# Altium PCB PCB1.PcbDoc (part 2 of 4)
Units mm, origin at the board's own origin, x right, y up, seen from the top; angles counter-clockwise.
Board outline 200 x 55 mm, 4 copper layers (Top Layer, Power Layer, GND Layer, Bottom Layer), stack 1.714 mm thick; 402 components, 269 nets, 1338 pads, 752 vias.
Unrouted connection lines stored in the file: 36.
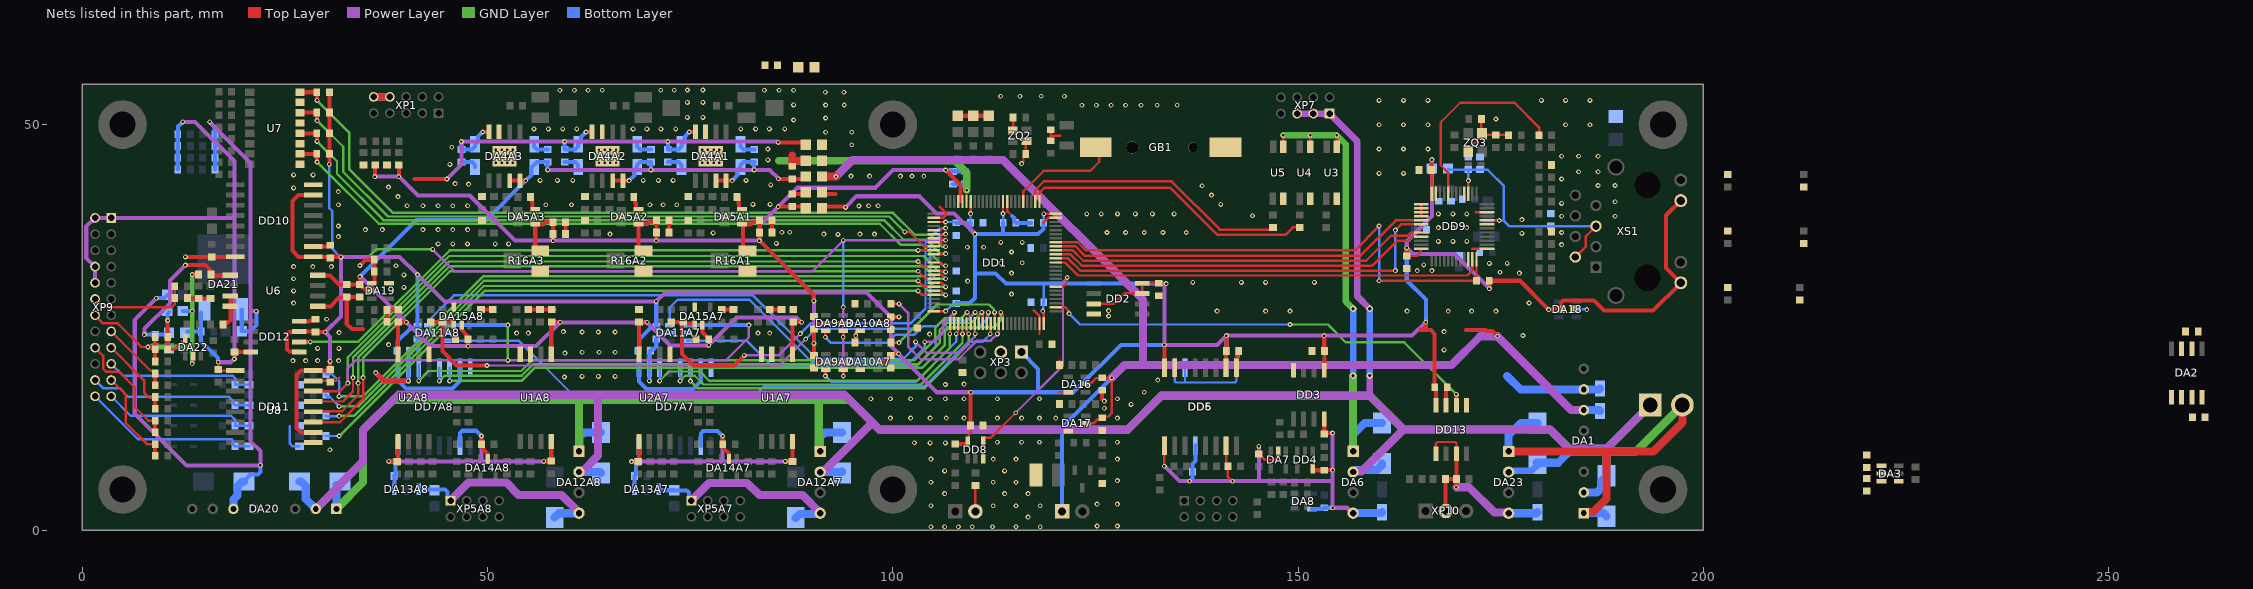
[diagram p4: the nets of this part, all layers, seen from the top]

## Via types
v1: diameter 0.6, hole 0.3, Top Layer to Bottom Layer, tented both sides, 711 vias
v2: diameter 0.6, hole 0.3, Top Layer to Bottom Layer, 36 vias
v3: diameter 0.8, hole 0.4, Top Layer to Bottom Layer, tented both sides, 4 vias
v4: diameter 0.5, hole 0.2, Top Layer to Bottom Layer, tented both sides, 1 vias

## Nets (pads, with @x,y where several pads share a name; then routed paths per layer and width w, separated by ;. In a path a pad name is that pad's centre, name@x,y a point inside that pad or via, vN(x,y) a via of type N, cw(c..) or ccw(c..) an arc to the next point about the centre after c; other vN are vias at no path point) (continued)
+3.3V: C6.1 C10.1 C13.2 C14.2 C15.2 C19.1 C20.1 C26.1 C37.1 C40.1 C41.1 C51A7.1 C51A8.1 C54A7.1 C54A8.1 C60A7.1 C60A8.1 C77.1 C80.1 C85.1 C90.1 C100.1 C103.1 C105.1 C119.1 DA2.2 DA2.3 DA2.6 DA2.7 DA10A7.2 DA10A8.2 DA11A7.5 DA11A8.5 DA18.5 DD1.11 DD1.19 DD1.28 DD1.50 DD1.75 DD1.100 DD2.3 DD2.7 DD2.8 DD3.1 DD5.10 DD5.16 DD6.7 DD7A7.1 DD7A7.7 DD7A8.1 DD7A8.7 DD8.5 DD9.24 DD9.36 DD10.1 DD10.7 DD11.10 DD11.16 DD12.1 DD12.3 DD13.8 L2.1 L6.1 R54.2 R69.2 R90.1 R91.1 R93.1 R94.1 XP3.1 XS1.9 XS1.11 | length 510
  Top Layer w0.3: DD1.50@105.075,27 v1(106.525,27) ; DD1.28@105.075,38 v1(106.525,38) ; DD8.5@109.125,10.6 109.25,10.725 DD8.5@109.25,10.95 109.375,11.075 109.375,11.75 109.6,11.975 C77.1@109.6,12.9 ; v1(109.6,39.025) DD1.19@109.6,40.525 ; v1(113.6,39.025) DD1.11@113.6,40.525 ; v1(118.5,27) 118.5,26.919 118.6,26.819 DD1.75@118.6,25.475 ; v1(118.625,39) DD1.100@120.125,39 ; DD2.3@124.796,27.896 127.221,27.896 128.521,29.196 DD2.7@130.796,29.196 DD2.8@130.796,30.446 C26.1@132.796,30.446 132.818,30.423 133.702,30.423 v1(133.725,30.4) ; C90.1@163.4,33.8 164.644,33.8 165.12,34.276 165.12,34.7 DD9.36@165.2,34.7 ; C85.1@166.475,44.425 C85.1@166.45,44.4 166.5,44.35 DD9.24@166.5,41.5 ; v1@166.475,45.675 v1(166.5,45.7)
  Top Layer w0.5: DD12.1@26.8,21.95 26.75,22 25.593,22 25.3,22.293 25.3,24.157 25.593,24.45 26.75,24.45 DD12.3@26.8,24.5 26.825,24.475 C105.1@28.775,24.475 ; DD11.16@28.485,19.685 28.468,19.667 26.992,19.667 26.48,19.155 26.48,12.61 27.04,12.05 DD11.10@28.5,12.05 ; DD11.16@28.5,19.67 30.47,19.67 C103.1@30.6,19.8 v1(30.6,20.8) ; DD10.7@28.5,41.325 26.7,41.325 25.95,40.575 25.95,34.466 26.711,33.705 DD10.1@28.5,33.705 28.502,33.703 30.598,33.703 C100.1@30.613,33.687 ; C105.1@28.825,24.425 28.831,24.419 29.981,24.419 v1(30,24.4) ; v1(30.5,45.1) R94.1@30.5,46.4 R91.1@30.5,51.5 R90.1@30.5,54 ; C100.1@30.613,33.713 31.913,33.713 v1(31.925,33.7) ; L2.1@91.275,39.7 91.475,39.9 92.95,39.9 94.048,39.9 94.147,39.801 v1(94.174,39.801) ; DA10A7.2@98.142,20.75 98.167,20.775 98.967,20.775 99.892,21.7 100.648,21.7 100.698,21.75 v1(100.725,21.75) ; DA10A8.2@98.142,25.525 98.167,25.55 98.967,25.55 99.717,26.3 C51A8.1@99.767,26.3 v1(100.767,26.3) ; R54.2@107.7,10.6 DD8.5@109.125,10.6 ; C77.1@109.6,12.9 v1(109.6,17) ; DD5.16@133.506,20.01 v1(133.506,22.85) ; DD5.10@141.126,20.01 C41.1@141.126,21.838 ; C41.1@141.15,21.786 v1(141.15,23.975) ; C37.1@153.225,22.1 v1(153.225,23.975) ; DD3.1@153.231,19.7 C37.1@153.231,22.056 ; C90.1@163.4,33.8 v1(163.4,34.8) ; 165.1,24.65 165.7,24.65 165.749,24.7 165.749,24.67 ; 165.75,24.67 166.38,24.67 166.85,24.2 C119.1@166.85,17.625 166.989,17.486 DD13.8@166.989,15.4 ; 165.75,24.7 v1(165.75,25.654) ; C85.1@166.475,44.425 v1@166.475,45.675 ; v1(173.6,29.775) 173.587,29.788 173.587,30.738 R69.2@173.575,30.75 177.35,30.75 v1(180.9,27.2) 182.475,27.2 C80.1@182.5,27.225 182.5,28.124 182.676,28.3 186.512,28.3 187.712,27.1 193.8,27.1 XS1.9@197.2,30.5 195.4,32.3 195.4,38.83 XS1.11@197.2,40.63
  Power Layer w0.5: v1(30.6,20.8) 30.6,23.8 v1(30,24.4) 31.925,26.325 v1@31.925,33.675 ; v1(31.925,33.7) 39.175,33.7 v1(41.375,31.5) 44.7,28.175 57.386,28.175 57.411,28.2 v1(70.825,28.2) 71.943,29.318 96.749,29.318 99.767,26.3 ; v1(94.174,39.801) 95.55,41.176 103.249,41.176 ; v1@100.7,21.725 105.425,17 v1(109.6,17) ; v1(100.725,21.75) 99.767,22.708 99.767,26.3 ; v1(100.767,26.3) 99.767,26.3 ; 103.275,41.176 103.249,41.176 ; v1(110.125,36.5) 107.575,39.05 105.375,39.05 103.249,41.176 ; v1(133.506,22.85) 140.025,22.85 v1@141.131,23.956 ; v1@133.506,22.877 133.506,30.154 133.725,30.373 v1(133.725,30.4) ; v1(141.15,23.975) v1(153.225,23.975) 164.071,23.975 v1(165.75,25.654) ; v1(166.5,45.7) 166.5,38.711 163.4,35.611 v1(163.4,34.8) 164.145,34.055 169.32,34.055 v1(173.6,29.775)
  Bottom Layer w0.3: v1(30.5,45.1) 30.5,39.703 30.875,39.328 30.875,34.674 31.849,33.7 v1(31.925,33.7) ; v1(106.525,27) 107.175,27.65 107.5,27.65 107.825,27.975 107.849,27.999 C15.2@107.849,28.024 ; v1(106.525,38) 107.725,38 C14.2@107.825,37.9 ; C10.1@109.575,37.9 109.587,37.912 109.587,39.013 v1(109.6,39.025) ; v1(113.6,39.025) 113.612,39.013 C13.2@113.612,37.9 ; v1(118.5,27) 118.557,27.057 118.557,28.032 C20.1@118.625,28.1 118.625,30.4 ; C19.1@118.575,37.9 118.6,37.925 118.6,38.975 v1(118.625,39) ; L6.1@166.5,44.6 v1(166.5,45.7) ; v1(180.9,27.2) 180.912,27.212 182.137,27.212 DA18.5@182.15,27.225
  Bottom Layer w0.5: C54A8.1@41.375,25.1 41.221,24.946 40.569,24.946 38.92,23.297 38.92,22.163 C60A8.1@38.857,22.1 38.99,21.967 DD7A8.1@38.99,20 38.99,18.435 39.94,17.485 45.681,17.485 46.61,18.414 DD7A8.7@46.61,20 ; C54A8.1@41.375,25.125 v1(41.375,31.5) ; C54A8.1@41.425,25.1 41.6,24.925 41.6,24.875 42.125,24.35 42.775,24.35 DA11A8.5@42.8,24.325 ; C60A7.1@68.575,22.1 C60A7.1@68.64,22.165 ; C60A7.1@68.622,22.183 C60A7.1@68.64,22.165 ; C54A7.1@70.825,25.1 C54A7.1@70.825,25.175 ; v1(70.825,28.2) C54A7.1@70.825,25.175 ; C54A7.1@70.875,25.175 71.7,24.35 72.475,24.35 DA11A7.5@72.5,24.325 ; DD7A7.7@76.325,20 76.325,18.402 75.348,17.425 69.631,17.425 68.705,18.351 DD7A7.1@68.705,20 68.705,22.1 C60A7.1@68.64,22.165 ; C15.2@107.825,27.975 109.451,27.975 110.125,28.649 110.125,31.654 ; C14.2@107.825,37.9 C10.1@109.575,37.9 109.575,37.05 v1(110.125,36.5) ; v1(109.6,17) 117.925,17 ; C13.2@113.625,37.9 113.625,36.5 ; XP3.1@115.865,21.94 117.925,19.88 117.925,17 ; C19.1@118.575,37.9 118.575,37.15 117.925,36.5 113.625,36.5 ; v1(133.506,22.85) 128.15,22.85 122.3,17 117.925,17 ; v1(133.725,30.4) 118.625,30.4 113.95,30.4 112.696,31.654 110.125,31.654 ; DD6.7@141.108,20.01 C40.1@141.108,22.052 ; C40.1@141.15,21.868 v1(141.15,23.975) ; v1(163.4,34.8) 163.4,30.804 165.75,28.454 v1(165.75,25.654) ; C60A7.1@68.64,22.165 68.75,22.275 68.75,23.575 70.175,25 70.65,25 C54A7.1@70.825,25.175 ; 110.125,31.654 v1(110.125,36.5) ; v1(110.125,36.5) 113.625,36.5
+3.3VA: C9.1 C12.2 C17.2 C34A1.1 C34A2.1 C34A3.1 C35A1.1 C35A2.1 C35A3.1 C53A7.1 C53A8.1 DA5A1.4 DA5A2.4 DA5A3.4 DA9A7.5 DA9A8.5 DD1.21 DD1.22 L2.2 R16A1.3 R16A2.3 R16A3.3 R17A4.1 R17A5.1 | length 138.5
  Top Layer w0.3: DD1.22@108.1,40.525 108.35,40.525 DD1.21@108.6,40.525
  Top Layer w0.5: v1(36.125,43.593) 36.144,43.612 36.144,44.994 R17A5.1@36.175,45.025 ; v1(39.073,43.59) R17A4.1@39.073,45.018 ; R16A3.3@56.525,34.475 56.3,34.475 55.9,34.875 DA5A3.4@55.9,37.7 56.892,37.7 57.172,37.98 C34A3.1@58.1,37.98 ; v1@58.1,35.895 C35A3.1@58.1,36.525 ; C35A3.1@58.1,36.33 C34A3.1@58.1,37.7 ; DA5A2.4@68.65,37.7 68.65,34.775 R16A2.3@68.95,34.475 ; DA5A2.4@68.8,37.7 68.825,37.725 69.717,37.725 70.043,38.051 70.696,38.051 C34A2.1@70.85,38.205 C35A2.1@70.85,36.705 70.838,36.692 70.838,35.713 v1(70.825,35.7) ; R16A1.3@82.1,34.475 81.95,34.475 81.55,34.875 81.55,37.7 81.554,37.704 82.482,37.704 82.757,37.98 83.375,37.98 83.55,38.155 C34A1.1@83.55,38.205 ; C34A1.1@83.55,37.98 C35A1.1@83.55,36.705 v1(83.55,35.7) 90.256,28.994 90.256,28.294 v1(90.275,28.275) ; v1(85.875,39.9) C9.1@87.6,39.9 ; C9.1@87.625,39.9 89.075,39.9 L2.2@89.275,39.7 ; C53A7.1@90.15,21.525 90.2,21.525 90.95,20.775 91.575,20.775 DA9A7.5@91.6,20.75 ; C53A7.1@90.275,21.525 v1(90.275,23.025) C53A8.1@90.275,24.775 90.325,24.775 90.5,24.95 90.5,25 91,25.5 91.575,25.5 DA9A8.5@91.6,25.525 ; v1@106.544,44.381 108.35,42.575 108.35,40.525
  Power Layer w0.5: v1(36.125,43.593) v1@39.119,43.593 ; v1@39.146,43.593 v1@39.119,43.593 ; v1(90.275,23.025) v1(90.275,28.275) ; v1(106.525,44.4) 100.05,44.4 97.875,42.225 88.225,42.225 83.55,37.55 v1(83.55,35.7) v1(70.825,35.7) v1(58.1,35.7) 53.399,35.7 47.824,41.275 41.463,41.275 39.167,43.571 39.119,43.571 v1@39.119,43.593
  Bottom Layer w0.5: v1@36.125,43.566 v1(36.125,43.593) ; v1(106.525,44.4) 106.582,44.343 107.332,44.343 C17.2@107.425,44.25 ; C17.2@107.433,44.258 C12.2@108.841,44.258
+3.3VA_ETH: C78.1 C89.1 C92.1 DD9.8 DD9.15 L6.2 XS1.2 XS1.5 | length 33.6
  Top Layer w0.3: DD9.15@171,41.5 v1(171,43.1) ; DD9.8@173.3,38.2 174.797,38.2 v1(174.816,38.182) ; XS1.2@184.2,33.677 185.5,34.977 185.5,36.247 XS1.5@186.74,37.487
  Bottom Layer w0.3: L6.2@168.5,44.6 168.65,44.45 C89.1@170.975,44.45 ; v1(171,43.1) 171,44.425 C89.1@170.975,44.45 ; v1(174.816,38.182) 175.382,38.182 ; XS1.5@186.74,37.487 C78.1@181.179,37.487 176.013,37.487 175.382,38.118 175.382,42.433 173.365,44.45 C92.1@172.442,44.45 C89.1@170.975,44.45
+5V: C2.1 C4.2 C5.1 C73.1 C74.1 DA1.6 DA2.4 DA3.3 DA3.4 DA16.2 DA17.2 L1.1 XP6.1 | length 156.3
  Top Layer w0.3: DA16.2@123.937,18.085 123.941,18.088 124.46,18.088 125.088,18.716 125.764,18.716 C73.1@125.837,18.788 125.849,18.776 126.974,18.776 v1(126.987,18.763) ; DA17.2@123.95,13.15 124.755,13.15 125.184,13.579 125.579,13.579 C74.1@125.85,13.85 ; C74.1@125.85,13.9 125.85,14.007 126.607,14.007 127,14.4 v1@127,18.763
  Top Layer w0.5: 170.735,24.65 171.1,24.65 173.1,24.65 173.209,24.541 173.952,24.541 v1@174.574,23.919
  Top Layer w1: L1.1@91.275,43.6 v1(93,43.6)
  Power Layer w1: v1(93,43.6) 95.058,45.658 113.542,45.658 ; 113.617,45.658 130.85,28.424 130.85,20.35 ; v1@126.934,18.698 126.993,18.757 128.587,20.35 130.85,20.35 ; v1@174.593,23.877 183.65,14.82 DA1.6@185.25,14.82 ; v1(174.593,23.9) 172.465,23.9 168.915,20.35 130.85,20.35
  Bottom Layer w0.5: XP6.1@120.896,2.3 120.896,12.673 v1(126.987,18.763)
  Bottom Layer w1: DA1.6@185.25,14.82 187.125,14.82 187.225,14.72 C2.1@187.225,14.675
+5V_DRVA7: C57A7.1 C62A7.1 C64A7.1 C67A7.1 C68A7.1 DA13A7.1 DA14A7.2 DD7A7.10 DD7A7.16 U1A7.8 U2A7.1 | length 42.9
  Top Layer w0.5: v1(67.775,8.45) 67.787,8.463 68.587,8.463 C57A7.1@68.6,8.475 ; C57A7.1@68.625,8.475 68.7,8.55 U2A7.1@68.7,10.925 ; v1(79.025,11.6) C68A7.1@79.025,10.575 79.2,10.4 79.2,10.025 79.775,9.45 79.775,8.785 DA14A7.2@79.8,8.76 ; v1(86.75,8.475) C62A7.1@87.625,8.475 U1A7.8@87.625,11.1
  Power Layer w0.5: v1(67.775,8.45) 69.05,8.45 69.075,8.475 79.025,8.475 ; v1(79.025,11.6) 79.025,8.475 ; v1(86.75,8.475) 79.025,8.475
  Bottom Layer w0.5: v1(67.775,8.45) 67.787,8.438 68.562,8.438 C64A7.1@68.575,8.425 ; C67A7.1@68.12,6.62 68.12,5.028 DA13A7.1@68.145,5.003 ; C67A7.1@68.125,6.675 68.3,6.85 68.3,7.157 68.336,7.193 68.336,7.907 68.4,7.971 C64A7.1@68.4,8.2 ; C64A7.1@68.705,8.505 DD7A7.16@68.705,10.6 ; DD7A7.10@76.325,10.4 76.325,11.932 76.618,12.225 78.373,12.225 78.998,11.6 v1(79.025,11.6)
+5V_DRVA8: C57A8.1 C62A8.1 C64A8.1 C67A8.1 C68A8.1 DA13A8.1 DA14A8.2 DD7A8.10 DD7A8.16 U1A8.8 U2A8.1 | length 43.5
  Top Layer w0.5: v1(37.835,8.475) C57A8.1@38.875,8.475 38.985,8.585 U2A8.1@38.985,10.925 ; v1(49.275,11.6) 49.275,10.525 49.45,10.35 49.45,10.008 50.025,9.433 50.025,8.785 DA14A8.2@50.05,8.76 ; v1(56.95,8.475) 56.963,8.488 57.863,8.488 C62A8.1@57.875,8.5 U1A8.8@57.875,10.925
  Power Layer w0.5: v1(37.835,8.475) 49.275,8.475 ; v1(49.275,11.6) 49.275,8.475 ; v1(56.95,8.475) 49.275,8.475
  Bottom Layer w0.5: v1(37.835,8.475) 38.675,8.475 38.915,8.475 38.99,8.55 DD7A8.16@38.99,10.4 ; C67A8.1@38.5,6.675 38.675,6.85 38.675,7.193 38.675,8.25 C64A8.1@38.85,8.425 ; DA13A8.1@38.525,5.025 C67A8.1@38.525,6.65 ; DD7A8.10@46.61,10.4 46.61,11.957 46.903,12.25 48.598,12.25 49.248,11.6 v1(49.275,11.6)
+5V_FS: C116.1 C117.1 C118.1 DA23.4 DD13.1 DD13.3 XP10.2 | length 26.2
  Top Layer w0.3: DD13.1@166.989,9.4 166.99,10.685 167.166,10.861 169.363,10.861 169.539,10.685 DD13.3@169.539,9.4
  Top Layer w0.5: XP10.2@168.225,2.35 168.2,2.375 168.2,6.275 C116.1@168.175,6.3 C117.1@169.525,6.3 ; C117.1@169.539,6.311 DD13.3@169.539,9.4
  Top Layer w0.6: v1(169.525,5.275) 169.525,6.297 C117.1@169.539,6.311
  Power Layer w1: v1(169.525,5.275) 171.1,5.275 174.223,2.152 175.898,2.152 DA23.4@175.975,2.075
  Bottom Layer w0.6: DA23.4@175.899,2.151 DA23.4@175.975,2.075
  Bottom Layer w1: DA23.4@175.975,2.075 179.4,2.075 C118.1@179.525,2.2
+5V_HW: C97.1 C98.1 C108.1 C109.1 DA21.3 DD10.16 DD11.1 DD12.8 L7.1 R107.2 R108.2 R109.2 R110.2 XP9.1 XP9.2 XP9.8 XP9.10 | length 93.6
  Top Layer w0.3: C98.1@16.8,19.8 v1(16.8,20.7) ; C98.1@17.1,19.695 17.125,19.67 DD11.1@18.8,19.67 ; v1(18.8,21.1) C108.1@18.8,21.95
  Top Layer w0.5: v1(12.75,33.7) C97.1@16,33.7 16.005,33.705 18.995,33.705 DD10.16@19,33.71 ; C108.1@18.8,21.95 DD12.8@20.8,21.95
  Power Layer w0.5: XP9.10@1.6,30.5 XP9.8@1.6,32.5 0.518,33.582 0.518,37.418 XP9.2@1.6,38.5 18.8,38.5 ; v1(12.425,50.35) 13.956,50.35 18.8,45.506 18.8,38.5 ; v1(12.75,33.7) 12.755,33.705 18.8,33.705 ; v1(16.8,20.7) 18.373,20.7 18.773,21.1 v1(18.8,21.1) 18.8,33.705 ; 18.8,33.705 18.8,38.5
  Bottom Layer w0.5: R107.2@11.809,44.475 R108.2@11.809,45.925 R110.2@11.809,48.825 ; R110.2@11.825,48.8 11.825,49.75 v1(12.425,50.35) ; L7.1@13,24.5 C109.1@14.7,24.5 ; DA21.3@14.7,26.804 C109.1@14.7,24.5 ; v1@16.767,20.733 16.781,20.746 16.781,21.194 14.7,23.275 C109.1@14.7,24.5
+5V_PS: C39.1 C43.1 C44.1 C45.1 C46.1 C47.1 C48.1 DA6.4 DA7.2 DA8.5 DD3.8 DD4.5 DD5.1 DD5.7 DD6.13 | length 66
  Top Layer w0.3: v1@133.456,7.875 v1(133.506,7.875) DD5.1@133.506,10.41 ; DD5.7@141.126,10.41 141.126,8.13 C46.1@141.356,7.9 ; C46.1@141.356,7.875 141.313,7.875 141.313,6.619 v1(141.906,6.025) ; v1(145.15,10.325) C44.1@145.15,9.375 145.2,9.375 145.925,8.65 146.164,8.65 ; 146.114,8.65 146.164,8.65 ; DA7.2@147.55,9.725 147.425,9.6 147.425,9.051 147.024,8.65 146.164,8.65
  Top Layer w0.5: DD4.5@151.8,7.575 151.8,7.4 151.825,7.375 C43.1@153.225,7.375 153.238,7.388 154.237,7.388 v1(154.25,7.4) ; C39.1@153.225,11.85 C39.1@153.225,11.975 ; DD3.8@153.225,13.7 C39.1@153.225,11.975 ; v1(154.25,11.975) C39.1@153.225,11.975
  Power Layer w0.5: v1(133.506,7.875) 135.356,6.025 v1(136.606,6.025) v1(141.906,6.025) 145.15,6.025 ; v1@145.15,10.298 145.15,6.025 ; v1(154.25,11.975) v1(154.25,7.4) 154.25,6.025 ; DA6.4@156.781,2.08 156.709,2.08 156.039,2.75 v1(154.25,2.75) 154.25,6.025 ; 145.15,6.025 154.25,6.025
  Bottom Layer w0.5: v1(136.606,6.025) 136.956,6.375 C47.1@136.956,7.2 136.956,8.15 137.316,8.51 DD6.13@137.316,10.4 DD6.13@137.316,10.41 ; DA8.5@151.725,2.575 153,2.575 153.175,2.75 C48.1@153.225,2.75 v1(154.25,2.75)
  Bottom Layer w1: DA6.4@156.781,2.08 160.25,2.08 160.35,2.18 C45.1@160.35,2.2
+5VA: C3.1 C30A1.1 C30A2.1 C30A3.1 C31A1.1 C31A2.1 C31A3.1 C56A7.1 C56A8.1 C63A7.1 C63A8.1 C69A7.1 C69A8.1 C99.1 C102.1 DA4A1.7 DA4A1.8 DA4A2.7 DA4A2.8 DA4A3.7 DA4A3.8 DA15A7.2 DA15A8.2 DA19.2 L1.2 U1A7.1 U1A8.1 U2A7.8 U2A8.8 U6.8 | length 175.3
  Top Layer w0.5: U6.8@29.05,31.425 29.067,31.408 30.567,31.408 31.7,30.275 C99.1@32.65,30.275 32.654,30.279 34.246,30.279 C102.1@34.25,30.282 ; C102.1@34.263,30.295 34.263,31.245 v1(34.275,31.257) ; C102.1@34.3,30.282 34.475,30.107 34.475,30.057 35,29.532 35.7,29.532 DA19.2@35.725,29.507 ; U2A8.8@38.985,21.675 C63A8.1@38.985,25.625 ; C63A8.1@38.998,25.638 39.004,25.631 39.994,25.631 v1(40,25.625) ; DA15A8.2@46.825,25.325 46.85,25.3 46.85,24.675 47.45,24.075 47.45,23.725 C69A8.1@47.625,23.55 v1(47.625,22.675) ; DA4A3.7@52.75,43.105 DA4A3.8@54,43.105 54.005,43.1 v1(54.725,43.1) ; U1A8.1@57.875,21.675 57.875,25.552 C56A8.1@57.96,25.638 ; C56A8.1@57.95,25.65 57.963,25.638 58.963,25.638 v1(58.975,25.625) ; DA4A2.7@65.466,43.105 65.471,43.1 v1(67.475,43.1) ; U2A7.8@68.7,21.675 68.7,25.6 68.75,25.65 68.762,25.638 69.688,25.638 v1(69.7,25.625) ; DA15A7.2@76.525,25.325 76.525,24.375 C69A7.1@77.262,23.638 ; v1(77.3,22.775) C69A7.1@77.3,23.55 ; DA4A1.7@78.2,43.105 78.205,43.1 v1(80.2,43.1) ; v1(85.9,43.325) C3.1@87.6,43.325 ; U1A7.1@87.619,21.681 87.619,25.606 87.663,25.65 C56A7.1@87.725,25.65 87.738,25.638 88.738,25.638 v1(88.75,25.625) ; C3.1@87.65,43.325 89,43.325 L1.2@89.275,43.6
  Power Layer w0.5: v1(34.275,31.257) 34.294,31.238 34.387,31.238 v1@39.981,25.644 ; v1(40,25.625) 42.95,22.675 v1(47.625,22.675) 56.025,22.675 58.987,25.638 59,25.625 v1(69.7,25.625) 72.55,22.775 v1@77.273,22.775 ; v1@57.675,44.425 v1(70.175,44.425) v1(82.9,44.425) 84.825,44.425 85.9,43.35 v1(85.9,43.325) ; v1(77.3,22.775) 80.747,26.222 88.153,26.222 v1(88.75,25.625)
  Bottom Layer w0.5: v1(34.275,31.257) 41.262,38.244 49.869,38.244 v1(54.725,43.1) 55.425,43.8 55.425,44.7 56.125,45.4 C30A3.1@57.45,45.4 57.437,45.387 57.437,44.438 v1(57.425,44.425) ; v1@67.494,43.119 68.125,43.75 68.125,44.425 C31A2.1@68.475,44.775 68.475,45.05 68.825,45.4 C30A2.1@70.175,45.4 v1(70.175,44.425) ; v1@80.219,43.119 80.875,43.775 80.875,44.425 C31A1.1@81.225,44.775 81.225,45.05 81.575,45.4 C30A1.1@82.925,45.4 82.912,45.387 82.912,44.438 v1(82.9,44.425)
+5VA_HW: C95.1 C113.1 L7.2 U6.1 | length 20.1
  Top Layer w0.5: v1(12.75,32.675) 15.233,32.675 15.725,32.183 15.725,31.7 16,31.425 U6.1@18.3,31.425
  Power Layer w0.5: v1(7.7,24.1) 7.7,24.832 10.841,27.973 10.841,30.766 v1(12.75,32.675)
  Bottom Layer w0.5: v1(7.7,24.1) 7.703,24.097 C113.1@9.032,24.097 ; C113.1@9.032,24.12 10.512,24.12 L7.2@10.717,24.325
+12V_DRVA7: C55A7.1 C61A7.2 DA12A7.4 DA13A7.3 XP5A7.1 | length 26.7
  Power Layer w1: XP5A7.1@75.185,3.653 77.357,5.825 82.023,5.825 83.545,4.303 88.847,4.303 DA12A7.4@91.05,2.1
  Bottom Layer w0.5: DA13A7.3@71.145,5.003 71.145,4.947 71.18,4.912 C61A7.2@73.045,4.912 ; C61A7.2@73.053,4.903 74.589,4.903 74.882,4.611 74.882,3.956 XP5A7.1@75.185,3.653
  Bottom Layer w1: C55A7.1@88.015,1.488 88.525,1.998 90.973,1.998 DA12A7.4@91.05,2.075 ; DA12A7.4@90.984,2.144 DA12A7.4@91.045,2.083
+12V_DRVA8: C55A8.1 C61A8.2 DA12A8.4 DA13A8.3 XP5A8.1 | length 26.6
  Power Layer w1: XP5A8.1@45.45,3.625 47.688,5.863 52.336,5.863 53.858,4.342 59.16,4.342 DA12A8.4@61.363,2.138
  Bottom Layer w0.5: DA13A8.3@41.525,5.025 43.475,5.025 44.758,5.025 45.1,4.683 45.1,3.975 XP5A8.1@45.45,3.625
  Bottom Layer w1: C55A8.1@58.3,1.525 58.85,2.075 DA12A8.4@61.325,2.075
+24V: C1.1 C38.1 C52A7.1 C52A8.1 C106.1 C115.1 DA1.2 DA6.2 DA12A7.2 DA12A8.2 DA20.2 DA23.2 XP2.1 XP7.1 XP7.3 XP7.5 | length 292.5
  Power Layer w0.8: XP7.5@149.875,51.375 XP7.3@151.875,51.375 XP7.1@153.875,51.375 157.324,47.926 157.324,28.801 v3(158.825,27.3) ; 158.831,16.569 v3(158.831,19.05)
  Power Layer w1: DA20.2@28.84,2.6 34.675,8.435 34.675,12.333 39.025,16.683 63.65,16.683 ; DA12A8.2@61.325,7.18 61.402,7.257 61.732,7.257 63.65,9.175 63.65,16.683 ; DA12A7.2@91.045,7.163 91.121,7.24 91.481,7.24 97.495,13.255 ; DA6.2@156.781,7.16 156.848,7.226 157.826,7.226 163,12.4 ; XP2.1@193.44,15.425 188.05,10.035 183.432,10.035 181.067,12.4 163,12.4 ; 63.65,16.683 94.067,16.683 97.495,13.255 ; 97.495,13.255 98.376,12.374 128.939,12.374 133.134,16.569 158.831,16.569 163,12.4
  Bottom Layer w0.8: v3(158.831,19.05) v3@158.831,27.3 ; DA23.2@175.975,7.155 176.09,7.27 176.514,7.27 176.582,7.337 178.825,7.337 179.525,8.037 C115.1@179.525,8.225
  Bottom Layer w1: C106.1@26.8,6 27,6 27.6,5.4 27.6,3.84 DA20.2@28.783,2.657 ; DA12A8.2@61.325,7.155 63.92,7.155 C52A8.1@64.025,7.05 ; DA12A7.2@91.045,7.163 91.065,7.183 93.725,7.183 C52A7.1@93.745,7.203 ; DA6.2@156.781,7.16 156.89,7.16 157.15,7.42 159.164,7.42 159.169,7.425 159.75,7.425 160.35,8.025 C38.1@160.35,8.225 ; C115.1@179.395,8.295 182.095,8.295 183.835,10.035 188.05,10.035 ; DA1.2@185.25,4.64 186.864,4.64 187.45,5.226 187.45,6.1 C1.1@188.05,6.7 188.05,10.035 ; XP2.1@193.44,15.425 188.05,10.035
+24V_HW: C107.2 C110.1 DA20.6 DA21.1 L8.1 R103.2 R104.2 R105.2 R106.2 | length 100.7
  Power Layer w0.5: v1(9.175,28.6) 6.5,25.925 6.5,14.391 12.903,7.988 v1(22,7.988) 22,9.741 20.8,10.941 20.8,26.996 ; v1(15.75,50.35) 20.8,45.3 20.8,26.996 ; v1(21.5,26.975) 21.481,26.994 20.802,26.994 20.8,26.996
  Bottom Layer w0.5: v1(9.175,28.6) 9.202,28.6 9.232,28.63 10.133,28.63 L8.1@10.518,29.015 ; v1(15.75,50.35) 15.75,50.323 16.348,49.725 16.348,48.886 R106.2@16.409,48.825 ; R103.2@16.409,44.475 R104.2@16.409,45.925 R105.2@16.409,47.375 R106.2@16.409,48.875 ; DA21.1@19.7,27.229 C107.2@19.7,24.535 19.732,24.567 20.792,24.567 21.5,25.275 v1(21.5,26.975) ; C110.1@19.959,6 20.804,6.845 21.707,6.845 22,7.138 v1(22,7.988)
  Bottom Layer w1: DA20.6@18.68,2.6 18.68,3.78 19.169,4.269 19.169,5.4 19.769,6 C110.1@19.959,6
+24VA_HW: C112.1 C114.1 DA22.5 L8.2 | length 7.7
  Top Layer w0.3: v1(10.55,25.85) v1@10.558,25.842 ; C112.1@10.575,22.3 C112.1@10.575,22.3 11.408,22.3 12.308,23.2 12.633,23.2 12.758,23.325 DA22.5@12.758,23.65
  Top Layer w0.5: C114.1@10.558,23.823 v1@10.558,25.842 ; C112.1@10.575,22.3 C114.1@10.574,23.864
  Bottom Layer w0.5: v1(10.55,25.85) 10.534,25.866 10.534,26.67 L8.2@10.753,26.888
+VBAT: DD1.6 GB1.2 | length 13.9
  Top Layer w0.3: DD1.6@116.1,40.525 116.1,41.777 118.648,44.325 124.375,44.325 125.475,45.425 GB1.2@125.475,47.2
-5V: C8.1 DA3.1 L3.1
-5VA: C11.1 C28A1.2 C28A2.2 C28A3.2 C29A1.1 C29A2.1 C29A3.1 DA4A1.4 DA4A2.4 DA4A3.4 L3.2 R10A1.1 R10A2.1 R10A3.1 | length 69.2
  Top Layer w0.5: 41,43.3 42.525,43.3 44.05,43.3 v1(45,43.3) ; v1(49.425,49.1) 50.195,49.1 DA4A3.4@50.2,49.105 ; v1(62.175,49.1) 62.911,49.1 DA4A2.4@62.916,49.105 ; v1(74.9,49.1) 75.645,49.1 DA4A1.4@75.65,49.105 ; v1(85.875,47.825) 87.575,47.825 88.975,47.825 L3.2@89.25,47.55
  Power Layer w0.5: v1(45,43.3) 46.8,45.1 v1(46.8,47.925) v1(59.525,47.925) v1(72.25,47.925) ; v1@72.277,47.925 85.723,47.925 85.854,47.794 v1@85.881,47.794
  Bottom Layer w0.5: v1(46.8,47.925) C29A3.1@46.8,46.95 48.125,46.95 48.475,47.3 C28A3.2@48.475,47.575 48.825,47.925 48.825,48.531 49.375,49.081 49.406,49.081 v1(49.425,49.1) ; v1(59.525,47.925) C29A2.1@59.525,46.95 60.85,46.95 61.2,47.3 C28A2.2@61.2,47.575 61.55,47.925 61.55,48.475 v1@62.156,49.081 ; v1(72.25,47.925) C29A1.1@72.25,46.95 73.6,46.95 73.95,47.3 C28A1.2@73.95,47.575 74.3,47.925 74.3,48.5 v1@74.881,49.081
ACTn: DD9.20 R61.2 | length 24.5
  Top Layer w0.3: DD9.20@168.5,41.5 168.5,44.1 167.6,45 167.6,50.3 170,52.7 176.7,52.7 179.725,49.675 R61.2@179.725,48.712
AGND: C3.2 C9.2 C11.2 C12.1 C17.1 C28A1.1 C28A2.1 C28A3.1 C29A1.2 C29A2.2 C29A3.2 C30A1.2 C30A2.2 C30A3.2 C31A1.2 C31A2.2 C31A3.2 C32A1.2 C32A2.2 C32A3.2 C33A1.2 C33A2.2 C33A3.2 C34A1.2 C34A2.2 C34A3.2 C35A1.2 C35A2.2 C35A3.2 C36A4.2 C36A5.2 C53A7.2 C53A8.2 C56A7.2 C56A8.2 C58A7.1 C58A8.1 C63A7.2 C63A8.2 C66A7.2 C66A8.2 C69A7.2 C69A8.2 C99.2 C101.2 C102.2 DA4A1.3 DA4A1.EPAD DA4A2.3 DA4A2.EPAD DA4A3.3 DA4A3.EPAD DA5A1.2 DA5A1.6 DA5A2.2 DA5A2.6 DA5A3.2 DA5A3.6 DA9A7.2 DA9A8.2 DA15A7.5 DA15A8.5 DA19.5 DD1.20 R1.2 R2.2 R3.2 R11A1.2 R11A2.2 R11A3.2 R13A1.2 R13A2.2 R13A3.2 R16A1.1 R16A2.1 R16A3.1 R31A7.2 R31A8.2 R38A7.2 R38A8.2 R96.2 U1A7.3 U1A7.4 U1A8.3 U1A8.4 U2A7.5 U2A8.5 U6.5 XP1.8 XP1.10 | length 86.5
  Top Layer w0.3: DD1.20@109.1,40.525 109.1,41.875 v1(109.125,41.9)
  Top Layer w0.5: U6.5@29.05,27.6 30.625,27.6 31.72,28.695 32.62,28.695 C99.2@32.65,28.725 ; C102.2@34.25,28.725 C99.2@32.65,28.725 ; 34.666,24.8 33.275,24.8 32.65,25.425 C99.2@32.65,28.725 ; C101.2@37.604,25.679 C101.2@37.6,25.682 R96.2@37.6,27.132 37.628,27.16 38.963,27.16 C63A8.2@38.994,27.191 ; R38A8.2@49.2,27.2 C66A8.2@50.65,27.2 ; R31A8.2@55.05,27.187 C56A8.2@58.287,27.187 ; C33A3.2@55.325,41.025 55.5,40.85 55.5,40.425 55.55,40.375 55.55,39.625 55.575,39.6 DA5A3.6@55.9,39.6 ; C35A3.2@59.65,36.525 C34A3.2@59.65,37.98 ; C33A2.2@68.05,41.075 68.225,40.9 68.225,40.425 68.325,40.325 68.325,39.625 68.35,39.6 DA5A2.6@68.65,39.6 ; C35A2.2@72.4,36.705 C34A2.2@72.4,38.205 ; R38A7.2@78.9,27.2 C66A7.2@80.35,27.2 ; C33A1.2@80.775,41.075 80.95,40.9 80.95,40.297 81.05,40.197 81.05,39.625 81.075,39.6 DA5A1.6@81.4,39.6 ; R31A7.2@84.825,27.2 C58A7.1@86.275,27.2 ; C35A1.2@85.1,36.705 C34A1.2@85.1,38.205 ; C9.2@87.625,41.45 89.075,41.45 R2.2@89.275,41.65 ; 92.926,25.525 DA9A8.2@93.75,25.525 ; 92.937,20.75 DA9A7.2@93.75,20.75
  Top Layer w0.9: XP1.10@35.975,53.425 XP1.8@37.975,53.425 ; 87.575,45.349 87.575,44.9 C3.2@87.6,44.875 ; 87.6,46.225 87.575,46.2 87.575,45.55 R1.2@89.275,45.55
  GND Layer w0.9: XP1.10@35.975,53.425 XP1.8@37.975,53.425 ; 85.899,45.555 107.659,45.555 109.125,44.09 v1(109.125,41.9)
  Bottom Layer w0.5: C29A3.2@46.8,45.4 48.125,45.4 48.475,45.05 C28A3.1@48.475,44.775 ; C31A3.2@55.775,47.575 55.775,47.3 56.125,46.95 C30A3.2@57.45,46.95 ; C29A2.2@59.525,45.4 60.85,45.4 61.2,45.05 C28A2.1@61.2,44.775 ; C31A2.2@68.475,47.575 68.475,47.3 68.825,46.95 C30A2.2@70.175,46.95 ; C29A1.2@72.25,45.4 73.6,45.4 73.95,45.05 C28A1.1@73.95,44.775 ; C31A1.2@81.225,47.575 81.225,47.3 81.575,46.95 C30A1.2@82.925,46.95 ; C17.1@107.425,42.7 107.429,42.704 108.887,42.704 C12.1@108.891,42.708 108.931,42.708 109.106,42.533 109.106,41.918 v1@109.124,41.9
  Bottom Layer w0.9: XP1.10@35.975,53.425 XP1.8@37.975,53.425
  other v1: 39.7,29.925 39.7,31.475 38.725,32.6 43.925,35.3 45.725,35.3 47.55,35.3 50.975,35.3 52.625,35.3 85.65,35.35 65.125,36.5 77.85,36.65 86.325,36.725 87.3,36.725 34.95,37.05 37.05,37.05 42.05,37.05 43.925,37.05 45.725,37.05 47.559,37.05 40.1,40 42.05,40 43.925,40 45.725,40 47.559,40 57.2,40.125 60.375,40.125 70.05,40.125 71.675,40.125 73.35,40.125 82.75,40.175 84.875,40.175 38.975,41.125 37.8,42.3 84.95,42.575 47.675,42.675 46.025,42.725 56.5,43.125 58.625,43.125 60.525,43.125 69.225,43.125 71.1,43.125 72.9,43.125 81.9,43.125 45.375,45.1 84.6,45.65 84.6,47 45.6,47.225 55.75,49.475 57.525,49.475 59.3,49.475 61.025,49.475 67.975,49.475 69.675,49.475 71.4,49.475 73.225,49.475 81.25,49.475 83.075,49.475 84.775,49.475 86.675,49.475 87.775,50.575 74.675,50.9 76.575,50.9 87.775,52.45 74.675,52.75 76.575,52.75 58.95,54.25 60.725,54.25 62.425,54.25 64.175,54.25 71.375,54.25 73.05,54.25 84.175,54.25 85.975,54.25 87.775,54.25 74.675,54.275 76.575,54.275
  other v2: 51.05,45.305 51.75,45.305 52.45,45.305 53.15,45.305 63.766,45.305 64.466,45.305 65.166,45.305 65.866,45.305 76.5,45.305 77.2,45.305 77.9,45.305 78.6,45.305 51.05,46.105 51.75,46.105 52.45,46.105 53.15,46.105 63.766,46.105 64.466,46.105 65.166,46.105 65.866,46.105 76.5,46.105 77.2,46.105 77.9,46.105 78.6,46.105 51.05,46.905 51.75,46.905 52.45,46.905 53.15,46.905 63.766,46.905 64.466,46.905 65.166,46.905 65.866,46.905 76.5,46.905 77.2,46.905 77.9,46.905 78.6,46.905
AGND_HW: C95.2 C96.1 C111.2 C112.2 C113.2 C114.2 DA22.2 R72.2 R79.2 R111.2 R112.1 R113.2 U6.3 U6.4 XP9.14 | length 42.1
  Top Layer w0.3: XP9.14@1.6,26.5 2.6,25.5 4.4,25.5 7.325,22.575 v1(8.1,22.575) ; C112.2@9.024,22.426 C112.2@9.025,22.3 C112.2@9.025,22.3 ; v1(13.6,20.525) 13.654,20.579 13.654,21.446 DA22.2@13.708,21.5
  Top Layer w0.5: v1(8.1,22.575) 8.875,22.575 C112.2@9.024,22.426 ; C111.2@9,20.802 C112.2@9,22.275 ; C114.2@9.024,23.864 C112.2@9.024,22.426 ; C112.2@9.152,22.298 C112.2@9.024,22.426 ; R72.2@12.991,28.625 13.041,28.575 R79.2@14.391,28.575 C96.1@15.841,28.575 ; R112.1@17.408,25.345 17.408,25.395 17.583,25.57 17.948,25.57 18.3,25.921 U6.4@18.3,27.6 U6.3@18.3,28.875 U6.3@17.668,28.875
  Top Layer w0.6: v1(13.6,31.525) C95.2@14.35,31.525
  GND Layer w0.6: v1(8.1,22.575) 13.6,22.575 ; v1(13.6,20.525) 13.6,22.575 ; v1(13.6,31.525) v1(13.6,27) 13.6,22.575
  Bottom Layer w0.3: R113.2@12.438,27.015 R113.2@12.453,27
  Bottom Layer w0.5: v1(8.1,22.575) 10.542,22.575 R111.2@10.717,22.4 ; R113.2@12.453,27 12.46,27.008 13.592,27.008 v1(13.6,27)
AN_MOD_HW: R72.1 R75.2 XP9.12 | length 12.6
  Top Layer w0.3: XP9.12@1.6,28.5 2.6,27.5 11.076,27.5 11.441,27.865 R72.1@11.441,28.625 ; R72.1@11.441,28.599 R75.2@11.441,30.075
COM1_HW: R74.2 R82.1 XP9.17 | length 10.4
  Top Layer w0.3: XP9.17@3.6,22.5 7.648,18.452 7.648,16.952 8.3,16.3 R74.2@9.025,16.3
  Top Layer w0.5: R82.1@9.025,14.8 R74.2@9.025,16.3
COM2_HW: R77.2 R89.1 XP9.18 | length 15
  Top Layer w0.3: XP9.18@1.6,22.5 2.6,21.5 2.6,19.9 3,19.5 4.6,19.5 6.5,17.6 6.5,15.169 8.169,13.5 R77.2@9.025,13.5
  Top Layer w0.5: R89.1@9.025,12.05 R77.2@9.025,13.5
COM3_HW: R80.2 R83.1 XP9.21 | length 12.2
  Top Layer w0.3: XP9.21@3.6,18.5 5.4,16.7 5.4,13.2 8,10.6 R80.2@9.025,10.6
  Top Layer w0.5: R83.1@9.025,9.15 R80.2@9.025,10.6
CRASH_IND: DD1.3 R52.2 | length 33.8
  Top Layer w0.3: DD1.3@117.6,40.525 117.6,41.975 118.625,43 134.4,43 140.35,37.05 146.625,37.05 R52.2@146.9,37.325
DIG_MOD_HW: R71.2 R88.1 XP9.15 | length 9.1
  Top Layer w0.3: XP9.15@3.6,24.5 8.475,19.625 8.75,19.625 9.025,19.35 R71.2@9.025,19.3
  Top Layer w0.5: R88.1@9.025,17.8 R71.2@9.025,19.3
DRV1_AN_MOD: DD1.63 R28A7.1 | length 16.7
  Top Layer w0.3: R28A7.1@99.792,23.125 v1(100.767,23.125) ; v1(112.55,26.85) 112.6,26.8 DD1.63@112.6,25.475
  GND Layer w0.3: v1(100.767,23.125) 105.467,27.825 111.85,27.825 112.493,27.182 112.493,26.907 v1(112.55,26.85)
DRV1_CUR: C71A7.2 DA15A7.1 DD1.30 R42A7.1 | length 53.6
  Top Layer w0.3: DD1.30@105.075,37 105.924,37 106.119,37.195 106.47,37.195 v1(106.525,37.25)
  Top Layer w0.5: C71A7.2@72.691,25.65 R42A7.1@74.141,25.65 ; DA15A7.1@75.575,25.325 75.575,25.478 75.55,25.503 74.288,25.503 R42A7.1@74.141,25.65 ; v1@81.7,21.545 80.433,20.278 75.442,20.278 73.999,21.721 73.999,25.508 R42A7.1@74.141,25.65
  Power Layer w0.3: v1(81.7,21.55) 85.925,21.55 v1(88.6,24.225)
  Bottom Layer w0.3: v1(88.6,24.225) 89.9,25.525 102.251,25.525 104.041,27.315 104.041,35.466 105.768,37.193 106.468,37.193 v1(106.525,37.25)
DRV1_DIG_MOD: DA11A7.3 DD1.61 | length 43.6
  Top Layer w0.3: DD1.61@111.6,25.475 111.6,26.569 111.8,26.769 v1(111.8,26.85)
  Bottom Layer w0.3: DA11A7.3@74.65,23.375 81.95,23.375 85.075,20.25 102.925,20.25 105.33,22.655 105.33,23.655 106.715,25.04 110.64,25.04 111.8,26.2 v1(111.8,26.85)
DRV1_ERR1: DD1.55 DD7A7.5 | length 41.9
  Top Layer w0.3: v1(108.6,24.2) DD1.55@108.6,25.475
  GND Layer w0.3: v1(73.775,18.4) 74.409,19.034 75.584,19.034 76.668,17.95 103.475,17.95 108.6,23.075 v1(108.6,24.2)
  Bottom Layer w0.3: v1(73.775,18.4) 73.78,18.405 73.78,20.195 DD7A7.5@73.785,20.2
DRV1_ERR2: DD1.56 DD7A7.6 | length 41.4
  Top Layer w0.3: DD1.56@109.1,25.475 109.1,24.556 109.375,24.281 v1(109.375,24.2)
  GND Layer w0.3: v1(75.05,18.375) 75.925,17.5 103.95,17.5 109.375,22.925 v1(109.375,24.2)
  Bottom Layer w0.3: v1(75.05,18.375) 75.053,18.378 DD7A7.6@75.053,20.198
DRV1_ON: DD1.52 DD7A7.3 | length 43.2
  Top Layer w0.3: v1(107.025,24.2) 107.025,24.281 107.1,24.356 DD1.52@107.1,25.475
  GND Layer w0.3: v1@71.268,18.418 72.403,19.553 76.218,19.553 77.371,18.4 102.975,18.4 107.025,22.45 v1(107.025,24.2)
  Bottom Layer w0.3: DD7A7.3@71.245,20.2 71.248,20.198 71.248,18.402 v1(71.25,18.4)
DRV1_SEL_AN: DA9A7.6 DD1.54 | length 21.7
  Top Layer w0.3: v1(107.825,24.2) 107.825,24.281 108.1,24.556 DD1.54@108.1,25.475
  Top Layer w0.5: v1(91.7,19) 91.719,19.019 91.719,19.775 91.744,19.8 DA9A7.6@91.75,19.8
  Bottom Layer w0.3: v1(91.7,19) 92.436,18.264 102.839,18.264 107.825,23.25 v1(107.825,24.2)
DRV1_SEL_DIG: DA11A7.6 DD1.53 | length 45.8
  Top Layer w0.3: DD1.53@107.6,25.475 v1(107.6,26.85)
  Power Layer w0.3: v1(103.95,23.2) 105.092,23.2 106.22,24.327 106.22,25.47 v1(107.6,26.85)
  Bottom Layer w0.3: DA11A7.6@72.5,25.275 72.5,27.429 73.471,28.4 82.324,28.4 90.024,20.7 102.098,20.7 103.95,22.552 v1(103.95,23.2)
DRV2_AN_MOD: DD1.64 R28A8.1 | length 20.7
  Top Layer w0.3: R28A8.1@99.792,27.9 v1(100.767,27.9) ; 113.1,24.456 DD1.64@113.1,25.475
  Power Layer w0.3: v1(100.767,27.9) 101.89,26.778 101.89,22.635 103.46,21.065 108.075,21.065 110.381,23.372 112.072,23.372 v1(112.9,24.2)
DRV2_CUR: C71A8.2 DA15A8.1 DD1.31 R42A8.1 | length 82.4
  Top Layer w0.3: DD1.31@105.075,36.5 v1(106.525,36.5)
  Top Layer w0.5: C71A8.2@43,25.65 R42A8.1@44.45,25.65 ; DA15A8.1@45.875,25.325 45.875,25.525 45.75,25.65 R42A8.1@44.45,25.65 ; v1(49.95,20.3) 46.207,20.3 44.45,22.057 R42A8.1@44.45,25.65
  Power Layer w0.3: v1(49.95,20.3) 86.025,20.3 v1(89.275,23.55)
  Bottom Layer w0.3: v1(89.275,23.55) 90.531,24.806 102.471,24.806 104.613,26.948 104.613,35.044 106.067,36.498 106.523,36.498 v1(106.525,36.5)
DRV2_DIG_MOD: DA11A8.3 DD1.62 | length 74.2
  Top Layer w0.3: v1(112.025,24.2) 112.025,24.281 112.1,24.356 DD1.62@112.1,25.475
  Bottom Layer w0.3: DA11A8.3@44.95,23.375 53.83,23.375 60.522,16.683 83.083,16.683 84.137,17.737 103.887,17.737 109.36,23.21 111.085,23.21 v1@112.025,24.15
DRV2_ERR1: DD1.60 DD7A8.5 | length 74.4
  Top Layer w0.3: v1(111,26.85) 111,26.769 111.1,26.669 DD1.60@111.1,25.475
  GND Layer w0.3: v1(44.073,18.4) 44.706,19.033 54.222,19.033 55.671,20.483 103.158,20.483 105.812,23.137 105.812,24.702 106.65,25.54 109.69,25.54 v1(111,26.85)
  Bottom Layer w0.3: DD7A8.5@44.07,20 44.071,19.999 44.071,18.401 v1(44.073,18.4)
DRV2_ERR2: DD1.65 DD7A8.6 | length 76.2
  Top Layer w0.3: v1(113.325,26.85) 113.325,26.811 113.6,26.536 DD1.65@113.6,25.475
  GND Layer w0.3: v1(45.333,18.4) 54.225,18.4 55.858,20.033 103.658,20.033 106.388,22.763 106.388,24.44 106.943,24.996 112.471,24.996 113.325,25.85 v1(113.325,26.85)
  Bottom Layer w0.3: v1(45.333,18.4) 45.337,18.403 45.337,19.997 DD7A8.6@45.34,20
DRV2_ON: DD1.57 DD7A8.3 | length 75.6
  Top Layer w0.3: v1(109.175,26.85) 109.175,26.769 109.6,26.344 DD1.57@109.6,25.475
  GND Layer w0.3: v1(41.525,18.4) 42.743,19.618 54.17,19.618 55.485,20.933 102.658,20.933 105.225,23.5 105.225,24.925 106.404,26.104 108.429,26.104 v1(109.175,26.85)
  Bottom Layer w0.3: v1(41.525,18.4) 41.527,18.403 41.527,20.447 DD7A8.3@41.525,20.449
DRV2_SEL_AN: DA9A8.6 DD1.59 | length 22.6
  Top Layer w0.3: v1(91.7,23.775) 91.7,24.55 DA9A8.6@91.725,24.575 ; v1(110.15,26.85) 110.6,26.4 DD1.59@110.6,25.475
  Bottom Layer w0.3: v1(91.7,23.775) 91.7,23.75 92.325,23.125 99.338,23.125 100.288,24.075 102.636,24.075 103.724,25.162 105.463,25.162 106.15,25.85 109.15,25.85 v1(110.15,26.85)
DRV2_SEL_DIG: DA11A8.6 DD1.58 | length 76.6
  Top Layer w0.3: DD1.58@110.1,25.475 110.1,24.356 110.175,24.281 v1(110.175,24.2)
  Power Layer w0.3: v1(102.825,23.2) 104.132,21.893 108.159,21.893 110.118,23.852 110.118,24.143 v1(110.175,24.2)
  Bottom Layer w0.3: DA11A8.6@42.8,25.275 42.8,25.875 45.875,28.95 82.763,28.95 90.563,21.15 101.35,21.15 102.82,22.62 102.82,23.195 v1(102.825,23.2)
EMIS_IND: DD1.2 R51.2 | length 36.2
  Top Layer w0.3: DD1.2@118.1,40.525 118.1,41.607 118.693,42.2 134.256,42.2 140.056,36.4 148.425,36.4 149.35,37.325 R51.2@150.2,37.325
ETH_CS: DD1.92 DD9.29 | length 47.4
  Top Layer w0.3: DD1.92@120.125,35 122.525,35 123.673,33.852 157.716,33.852 162.064,38.2 DD9.29@165.2,38.2
ETH_INT: DD1.88 DD9.47 | length 53.7
  Top Layer w0.3: DD1.88@120.125,33 121.25,33 122.85,31.4 170.89,31.4 171.5,32.01 DD9.47@171.5,33.4
ETH_MISO: DD1.90 DD9.33 | length 47.1
  Top Layer w0.3: DD1.90@120.125,34 121.925,34 123.307,32.618 159.168,32.618 162.25,35.7 163.605,35.7 164.105,36.2 DD9.33@165.2,36.2
ETH_MOSI: DD1.91 DD9.32 | length 47
  Top Layer w0.3: DD1.91@120.125,34.5 120.838,34.5 122.222,34.5 123.498,33.224 158.387,33.224 161.463,36.3 163.498,36.3 163.898,36.7 DD9.32@165.2,36.7
ETH_RST: DD1.93 DD9.48 R69.1 | length 62.9
  Top Layer w0.3: DD1.93@120.125,35.5 122.825,35.5 123.825,34.5 157,34.5 v1(160,37.5) ; v1(160,30.75) 171.92,30.75 172.02,30.85 172,30.87 DD9.48@172,33.4
  Bottom Layer w0.3: v1(160,30.75) v1(160,37.5)
ETH_SCLK: DD1.89 DD9.30 | length 51
  Top Layer w0.3: DD1.89@120.125,33.5 121.625,33.5 123.125,32 v1(162,32) ; v1(162,37) 162.7,37.7 DD9.30@165.2,37.7
  Bottom Layer w0.3: v1(162,32) v1(162,37)
EXT_AN_MOD: C104.2 DA9A7.1 DA9A8.1 DA19.1 DD1.32 R97.1 | length 100.8
  Top Layer w0.3: v1(93.9,19) DA9A7.1@93.9,19.8 ; v1(93.9,23.775) DA9A8.1@93.9,24.575 ; DD1.32@105.075,36 106.063,36 106.255,35.807 106.467,35.807 v1(106.525,35.75)
  Top Layer w0.5: v1(34.275,32.632) 34.975,33.332 C104.2@36.05,33.332 R97.1@36.05,31.882 36.05,30.582 35.925,30.457 DA19.1@35.725,30.457
  Power Layer w0.3: v1(43.25,34.625) 45.95,31.925 90.1,31.925 v1(93.9,35.725) 93.925,35.75 v1(106.525,35.75) ; v1(93.9,19) v1(93.9,27.5)
  GND Layer w0.3: v1(34.275,32.632) 36.268,34.625 v1(43.25,34.625)
  Bottom Layer w0.3: v1(93.9,27.5) v1(93.9,35.725)
EXT_COM1: DD1.39 DD11.13 | length 86.4
  Top Layer w0.3: DD11.13@28.5,15.86 32.185,15.86 33.425,17.1 v1(33.425,18.8) ; v1(103.125,33.125) 103.75,32.5 DD1.39@105.075,32.5
  GND Layer w0.3: v1(33.425,18.8) 33.425,21.297 45.253,33.125 v1(103.125,33.125)
EXT_COM2: DD1.41 DD11.12 | length 90.5
  Top Layer w0.3: DD11.12@28.5,14.59 28.57,14.66 32.085,14.66 34.05,16.625 v1(34.05,18.125) ; DD1.41@105.075,31.5 106.025,31.5 v1(106.525,31)
  GND Layer w0.3: v1(34.05,18.125) 34.05,21.285 45.29,32.525 103.832,32.525 ; 103.857,32.525 103.832,32.525 ; v1(106.525,31) 105.357,31 103.832,32.525
EXT_COM3: DD1.42 DD11.11 | length 87.6
  Top Layer w0.3: DD11.11@28.5,13.32 31.845,13.32 34.675,16.15 v1(34.675,18.8) ; v1(103.125,31.925) 104.05,31 DD1.42@105.075,31
  GND Layer w0.3: v1(34.675,18.8) 34.675,21.234 45.366,31.925 v1(103.125,31.925)
EXT_DIG_MOD: DA11A7.1 DA11A8.1 DD1.40 DD11.14 | length 163
  Top Layer w0.3: DD11.14@28.5,17.13 31.8,17.13 v1(32.795,18.125) ; DD1.40@105.075,32 106.294,32 106.444,31.85 v1(106.525,31.85)
  Power Layer w0.3: v1(32.795,18.125) 32.795,19.968 33.751,20.925 v1(52.525,20.925) 79.4,20.925 82.25,23.775 v1(82.25,25.275)
  GND Layer w0.3: v1(32.795,18.125) 32.8,18.13 32.8,21.308 45.292,33.8 103.775,33.8 105.668,31.907 106.468,31.907 v1(106.525,31.85) ; v1(52.525,20.925) v1(52.525,25.275)
  Bottom Layer w0.5: DA11A8.1@44.95,25.275 v1(52.525,25.275) ; DA11A7.1@74.65,25.275 v1(82.25,25.275)
EXT_FLAG1: DD1.43 R98.2 | length 87
  Top Layer w0.3: DD1.43@105.075,30.5 106.025,30.5 v1(106.525,30)
  GND Layer w0.3: v1(31.7,16.488) 34.67,16.488 49.507,31.325 103.842,31.325 105.167,30 v1(106.525,30)
  Bottom Layer w0.3: R98.2@30.075,19.2 30.867,19.2 31.7,18.367 v1(31.7,16.488)
EXT_FLAG2: DD1.44 R99.2 | length 82.4
  Top Layer w0.3: v1(103.125,30.725) 103.85,30 DD1.44@105.075,30
  GND Layer w0.3: v1(31.7,15.26) 31.728,15.288 34.107,15.288 49.544,30.725 v1(103.125,30.725)
  Bottom Layer w0.3: R99.2@30.075,16.7 30.075,16.65 30.35,16.375 30.617,16.375 31.7,15.292 v1(31.7,15.26)
EXT_FLAG3: DD1.45 R100.2 | length 85.2
  Top Layer w0.3: DD1.45@105.075,29.5 105.964,29.5 106.464,29 v1(106.525,29)
  GND Layer w0.3: v1(31.7,14.06) 31.728,14.088 33.543,14.088 49.555,30.1 103.794,30.1 104.894,29 v1(106.525,29)
  Bottom Layer w0.3: R100.2@30.075,14.1 30.115,14.06 v1(31.7,14.06)
EXT_FLAG4: DD1.46 R101.2 | length 82.6
  Top Layer w0.3: v1(103.125,29.5) 103.625,29 DD1.46@105.075,29
  GND Layer w0.3: v1(31.7,11.6) 31.752,11.6 49.652,29.5 v1(103.125,29.5)
  Bottom Layer w0.3: R101.2@30.075,11.6 v1(31.7,11.6)
EXT_IL1: DD1.33 R90.2 U7.16 | length 92.4
  Top Layer w0.3: DD1.33@105.075,35.5 105.926,35.5 106.488,34.938 v1@106.535,34.938
  Top Layer w0.5: U7.16@26.92,54 R90.2@28.95,54 28.975,53.975 28.975,53.025 v1(29,53)
  GND Layer w0.3: v1(29,53) 32.95,49.05 32.95,44.525 38.35,39.125 100.05,39.125 102.775,36.4 104.642,36.4 106.084,34.958 106.516,34.958 v1@106.535,34.938
  other v1: 106.525,34.938
EXT_IL2: DD1.34 R91.2 U7.14 | length 87.4
  Top Layer w0.3: v1(101.475,36.775) 102.1,36.775 103.875,35 DD1.34@105.075,35
  Top Layer w0.5: U7.14@26.9,51.48 R91.2@28.93,51.48 ; R91.2@28.95,51.5 28.975,51.475 28.975,50.525 v1(29,50.5)
  GND Layer w0.3: v1(29,50.5) 32.225,47.275 32.225,44.175 37.725,38.675 99.575,38.675 v1(101.475,36.775)
EXT_KEY: DD1.36 R93.2 U7.12 | length 88.7
  Top Layer w0.3: DD1.36@105.075,34 106.344,34 106.444,34.1 v1(106.525,34.1)
  Top Layer w0.5: U7.12@26.9,48.94 28.91,48.94 R93.2@28.95,48.9 ; R93.2@28.95,48.94 28.975,48.915 28.975,47.965 v1(29,47.94)
  GND Layer w0.3: v1(29,47.94) 31.45,45.49 31.45,43.95 37.175,38.225 98.925,38.225 101.35,35.8 104.141,35.8 105.841,34.1 v1(106.525,34.1)
EXT_MP_EN: DD1.38 R94.2 U7.10 | length 87.5
  Top Layer w0.3: DD1.38@105.075,33 105.924,33 106.267,32.657 106.468,32.657 v1(106.525,32.6)
  Top Layer w0.5: U7.10@26.9,46.4 R94.2@28.95,46.4 28.975,46.375 28.975,45.425 v1(29,45.4)
  GND Layer w0.3: v1(29,45.4) 36.625,37.775 98.4,37.775 101,35.175 103.641,35.175 106.158,32.657 106.468,32.657 v1(106.525,32.6)
EXT_PMO: DD1.35 DD12.2 | length 83
  Top Layer w0.3: v1(103.125,34.5) DD1.35@105.075,34.5
  Top Layer w0.5: DD12.2@26.8,23.2 v1(28.15,23.2)
  GND Layer w0.3: v1(28.15,23.2) 34.055,23.2 45.355,34.5 v1(103.125,34.5)
FIBER_IL: DD1.82 DD8.4 | length 27.2
  Top Layer w0.3: DD8.4@111.15,10.95 111.15,11.275 111.275,11.4 112.1,11.4 v1(115.175,14.475) ; DD1.82@120.125,30 120.974,30 121.468,30.493 121.468,31.093 v1(121.525,31.15)
  Power Layer w0.3: v1(115.175,14.475) 121,20.3 121,30.625 v1(121.525,31.15)
FLAG1_HW: R114.2 U8.15 XP9.19 | length 18.5
  Bottom Layer w0.3: XP9.19@3.6,20.5 5.05,19.05 18.55,19.05 18.875,18.725 R114.2@18.875,17.94 U8.15@20.6,17.94
FLAG2_HW: R115.2 U8.13 XP9.22 | length 20.4
  Bottom Layer w0.3: XP9.22@1.6,18.5 2.6,17.5 4.6,17.5 5.682,16.418 18.128,16.418 18.6,15.946 18.6,15.675 R115.2@18.875,15.4 U8.13@20.6,15.4
FLAG3_HW: R117.2 U8.11 XP9.23 | length 19
  Bottom Layer w0.3: XP9.23@3.6,16.5 5.996,14.104 18.396,14.104 18.875,13.625 R117.2@18.875,12.86 U8.11@20.6,12.86 ; U8.11@20.585,13.02 U8.11@20.625,12.98
FLAG4_HW: R118.2 U8.9 XP9.24 | length 21.8
  Bottom Layer w0.3: XP9.24@1.6,16.5 6.9,11.2 18.467,11.2 18.643,11.024 18.643,10.552 R118.2@18.875,10.32 U8.9@20.6,10.32
FLOW: DD1.77 DD13.6 | length 55.4
  Top Layer w0.3: DD1.77@120.125,27.5 121.25,27.5 121.693,27.057 121.693,26.757 v1(121.75,26.7)
  Top Layer w0.5: v1(169.525,16.725) 169.532,16.718 169.532,15.407 DD13.6@169.539,15.4
  GND Layer w0.3: v1(149,25.35) 153.675,25.35 155.875,23.15 163.1,23.15 v1(169.525,16.725)
  Bottom Layer w0.3: v1(121.75,26.7) 123.1,25.35 v1(149,25.35)
GND: C2.2 C4.1 C5.2 C6.2 C8.2 C10.2 C13.1 C14.1 C15.1 C16.2 C18.2 C19.2 C20.2 C21.2 C22.2 C23.2 C24.2 C25.2 C26.2 C37.2 C40.2 C41.2 C50A7.2 C50A8.2 C51A7.2 C51A8.2 C54A7.2 C54A8.2 C60A7.2 C60A8.2 C72.2 C73.2 C74.2 C76.2 C77.2 C78.2 C79.2 C80.2 C81.2 C82.2 C83.2 C84.2 C85.2 C86.2 C87.2 C88.2 C89.2 C90.2 C91.2 C92.2 C93.2 C94.2 C100.2 C103.2 C105.2 C119.2 DA1.7 DA2.1 DA3.2 DA10A7.5 DA10A8.5 DA11A7.2 DA11A8.2 DA16.5 DA17.5 DA18.2 DD1.10 DD1.27 DD1.74 DD1.99 DD2.4 DD3.4 DD5.9 DD5.15 DD6.2 DD6.3 DD6.8 DD7A7.2 DD7A7.8 DD7A8.2 DD7A8.8 DD8.3 DD9.1 DD9.7 DD9.10 DD9.16 DD9.23 DD9.25 DD9.26 DD9.27 DD9.28 DD9.46 DD10.2 DD10.8 DD11.9 DD11.15 DD12.4 DD13.5 DD13.7 GB1.1 R1.1 R2.1 R3.1 R4.2 R5.2 R45.2 R48.1 R49.1 R65.1 U3.2 U4.2 U5.2 U7.9 U7.11 U7.13 U7.15 U8.2 U8.4 U8.6 U8.8 VD1.2 VD2.2 VD3.2 XP3.3 XP8.2 ZQ2.2 ZQ2.4 ZQ3.2 ZQ3.4 | length 110.4
  Top Layer w0.3: DD11.15@28.5,18.4 30.45,18.4 C103.2@30.6,18.25 30.757,18.407 31.349,18.407 31.742,18.8 ; DD1.27@105.075,38.5 106.176,38.5 106.552,38.876 106.552,39.124 105.776,39.9 ; XP8.2@110.2,2.3 C76.2@110.2,5.5 ; DD1.10@114.1,40.525 114.1,39.374 114.425,39.049 ; ZQ2.2@114.8,49.275 114.85,49.325 C23.2@114.85,50.875 ; v1(115.9,45.2) 115.9,45.281 116.125,45.506 116.125,46.1 C25.2@116.4,46.375 116.4,47.875 ZQ2.4@116.5,47.975 ; 117.383,27.126 118.1,26.409 DD1.74@118.1,25.475 118.1,24.225 ; 118.587,37.912 119.175,38.5 DD1.99@120.125,38.5 ; C22.2@119.5,48.025 119.5,48.625 ; C24.2@119.5,49.375 119.5,48.625 ; C72.2@120.538,20.35 120.538,20.886 ; 120.545,17.013 DA16.5@121.637,17.013 ; 120.65,48.625 119.5,48.625 ; DD9.28@165.2,38.7 DD9.27@165.2,39.2 DD9.26@165.2,39.7 DD9.25@165.2,40.2 ; ZQ3.4@170.975,46.7 171.425,47.15 171.425,47.375 172.225,48.175 172.225,48.45 172.525,48.75 C84.2@174.375,48.75 175.937,48.75 R65.1@175.975,48.712 ; 171.5,34.7 DD9.1@173.3,34.7 ; 171.9,39.2 DD9.10@173.3,39.2 ; C86.2@172.6,50.7 172.6,48.975 ZQ3.2@172.675,48.9
  Top Layer w0.5: DD12.4@26.8,25.75 28.075,25.75 28.15,25.825 28.625,25.825 C105.2@28.8,26 ; DD10.2@28.5,34.975 C100.2@30.325,34.975 ; R2.1@91.275,41.65 91.475,41.45 92.95,41.45 ; C50A7.2@95.342,23.125 95.442,23.225 v1(95.442,23.975) 95.442,24.35 95.667,24.575 DA10A8.5@95.992,24.575 ; VD1.2@108.025,51.1 VD2.2@109.935,51.1 VD3.2@111.85,51.1 ; C73.2@125.837,17.238 125.837,16.19 126.1,15.927 v1(126.1,15.9) ; DD5.9@142.396,20.01 142.446,20.06 142.446,21.288 142.506,21.348 142.506,21.9 C41.2@142.681,22.075 ; DD13.7@168.239,15.4 168.239,17.464 C119.2@168.4,17.625
  Top Layer w0.6: v1(36.225,19.425) 37.25,18.4 v1(40.25,18.4)
  Power Layer w0.6: v1(36.225,19.425) 37.25,18.4 v1(40.25,18.4)
  Bottom Layer w0.3: 25.64,12.8 25.64,10.66 25.976,10.324 U8.8@26.816,10.324 ; DD6.2@134.776,20.01 DD6.2@134.776,20 134.776,18.376 134.952,18.2 136.046,18.2 ; DD6.3@136.046,20.01 DD6.3@136.046,20 136.046,18.2 ; DD6.8@142.396,20.01 DD6.8@142.396,20 142.396,18.376 142.221,18.2 136.046,18.2 ; DA18.2@184.3,27.225 184.312,27.212 185.588,27.212 v1(185.6,27.2)
  Bottom Layer w0.5: v1(40.25,18.4) 40.255,18.405 40.255,19.995 DD7A8.2@40.26,20 40.26,22.003 40.582,22.325 41.244,22.325 41.375,22.456 C54A8.2@41.375,23.55 ; v1(69.975,18.4) DD7A7.2@69.975,20 C60A7.2@69.975,22 ; C60A7.2@70.147,22.078 70.147,22.172 70.3,22.325 70.532,22.325 70.825,22.618 C54A7.2@70.825,23.55 ; 114.734,38.74 115,38.474 115,38.075 C13.1@115.175,37.9 C19.2@117.025,37.9 ; DD6.8@142.396,20.01 142.446,20.06 142.446,21.291 142.506,21.351 142.506,21.9 C40.2@142.681,22.075
  Bottom Layer w1: 175.775,19.025 177.46,17.34 DA1.7@185.25,17.34 ; DA1.7@185.25,17.35 187.1,17.35 C2.2@187.225,17.475
  other v1: 104.7,0.4 106.4,0.4 108.1,0.4 109.8,0.4 112.3,0.4 115.2,0.4 118.2,0.4 125.2,0.5 127.7,0.5 116.7,1.6 104.7,3 112.4,3 115.2,3 118.2,3 125.2,3.2 127.7,3.2 106.4,4.5 113.8,4.5 116.7,4.5 104.7,5.9 112.4,5.9 115.2,5.9 127.7,6.1 106.4,7.3 113.8,7.3 104.7,8.75 112.4,8.75 115.2,8.75 127.7,8.75 30.575,9.9 104.6,10.75 106.5,10.75 102.675,10.775 112.9,10.825 115.9,10.825 118.1,10.825 127.7,10.825 99.7,13.8 102.2,13.8 104.6,13.8 106.6,13.8 108.8,13.8 112.9,13.8 115.9,13.8 118.1,13.8 120.1,13.8 127.7,13.8 126.1,15.025 129.4,15.5 97.3,16.2 99.7,16.2 102.2,16.2 104.6,16.2 106.5,16.2 108.8,16.2 112.9,16.2 118.1,16.2 127.7,16.2 131.025,17 106.5,17.95 108.8,18 132.681,18.5 59.5,18.875 61.675,18.95 63.7,18.95 65.75,18.95 26,20.9 27.575,20.9 29.05,20.9 31.65,20.9 59.55,21.825 61.675,21.925 63.775,21.925 65.75,21.925 168,22.225 29.05,22.4 31.675,22.4 37.818,22.872 177.725,24 104.55,24.175 53.6,24.3 55.05,24.3 83.375,24.3 84.825,24.3 31.7,24.35 61.675,24.425 63.7,24.425 65.75,24.425 59.375,24.475 168,24.475 30.175,26 126.625,26.4 140,27 146,27 149,27 163.45,27 168.525,27 171.4,27 174.4,27 126.625,27.06 26.1,28 178.484,28.009 114.65,29.1 26.1,29.5 137,30.55 143,30.55 146,30.55 152,30.55 109.225,30.7 26.1,31 114.65,31.7 177.3,31.7 174.9,31.8 164.7,32 166.5,32 26.1,32.5 28.45,32.5 30.75,32.5 165.5,32.7 173.6,32.9 175.8,32.9 113.325,32.975 115.975,32.975 114.65,34.3 109.2,34.875 111.2,34.875 182.5,35.2 113.325,35.475 115.975,35.475 167.3,35.6 169.1,35.6 170.8,35.6 31.625,36.2 93.25,36.475 91.5,36.5 95.95,36.5 97.75,36.5 177.6,36.6 126.425,36.7 128.725,36.7 131.025,36.7 133.325,36.7 136.2,36.7 182.5,36.7 167.3,37.3 169.1,37.3 170.8,37.3 31.625,37.5 177.6,38.3 182.5,38.7 189.1,38.7 144.375,38.775 123.925,39 125.725,39 127.725,39 129.925,39 132.025,39 134.7,39 167.3,39 169.1,39 170.8,39 95.825,39.975 97.025,40 98.2,40 31.625,40.125 140.464,40.164 182.5,40.3 189.1,40.5 139.314,41.314 31.6,41.75 26.1,42.2 138.164,42.464 187,42.5 189.1,42.5 182.5,43.3 94.85,43.65 97.15,43.65 100.95,43.65 102.375,43.65 103.825,43.65 26.1,43.805 28.5,43.805 160,44 163,44 184.6,44.2 187,44.2 182.5,46.1 184.6,46.1 187,46.1 160,47 163,47 166,47 94.95,47.525 91.725,49.075 94.95,49.075 160,50 163,50 166,50 183,50 186,50 174.4,50.7 91.725,50.825 123.325,52.4 125.125,52.4 126.925,52.4 128.725,52.4 130.625,52.4 132.625,52.4 135.1,52.4 91.725,52.425 94.025,52.425 160,53 163,53 166,53 180,53 183,53 186,53 113.3,53.5 115.675,53.5 118.325,53.5 121.175,53.5 91.7,54 93.975,54
GND_24V: C1.2 C38.2 C52A7.2 C52A8.2 C106.2 C115.2 DA1.1 DA6.1 DA12A7.1 DA12A8.1 DA20.1 DA23.1 U3.3 U4.3 U5.3 XP2.2 | length 309.8
  Top Layer w0.3: U5.3@148.175,47.275 v1(148.175,48.675) ; U4.3@151.475,47.275 v1(151.475,48.675) ; U3.3@154.775,47.275 v1(154.775,48.675)
  Top Layer w1: DA23.1@175.975,9.695 188.05,9.695 ; DA1.1@185.25,2.12 185.38,2.25 186.437,2.25 188.05,3.863 188.05,9.695 ; XP2.2@197.4,15.425 197.4,13.275 193.82,9.695 188.05,9.695
  GND Layer w0.8: v1(148.175,48.675) v1(151.475,48.675) v1(154.775,48.675) 155.875,47.575 155.875,28.2 v3(156.775,27.3)
  GND Layer w1: DA20.1@31.38,2.6 34.675,5.895 34.675,12.333 38.417,16.075 61.3,16.075 ; DA12A8.1@61.3,9.7 61.3,16.075 ; 90.875,15.75 90.875,9.87 DA12A7.1@91.05,9.695 ; v3(156.775,19.025) 156.781,19.019 156.781,16.575 ; DA6.1@156.781,9.7 156.781,16.575 ; XP2.2@197.4,15.425 191.67,9.695 183.772,9.695 181.067,12.4 162.998,12.4 158.823,16.575 156.781,16.575 ; 61.3,16.075 94.675,16.075 98.376,12.374 128.939,12.374 133.14,16.575 156.781,16.575
  Bottom Layer w0.3: C106.2@31.38,5.58 C106.2@31.8,6
  Bottom Layer w0.8: v3(156.775,19.025) v3(156.775,27.3)
  Bottom Layer w1: DA20.1@31.38,2.6 C106.2@31.38,5.58 ; DA12A8.1@61.325,9.695 61.325,11.464 61.911,12.05 C52A8.2@64.025,12.05 ; DA12A7.1@91.05,9.695 91.05,11.464 91.636,12.05 C52A7.2@93.75,12.05 ; DA6.1@156.781,9.7 156.781,11.781 158.225,13.225 C38.2@160.35,13.225 ; DA23.1@175.975,9.695 175.975,11.7 177.5,13.225 C115.2@179.525,13.225 ; DA1.1@185.25,2.1 187.65,2.1 C1.2@188.05,1.7